# EAGLE board cat layout fnl6 (EAGLE 6.5.0)
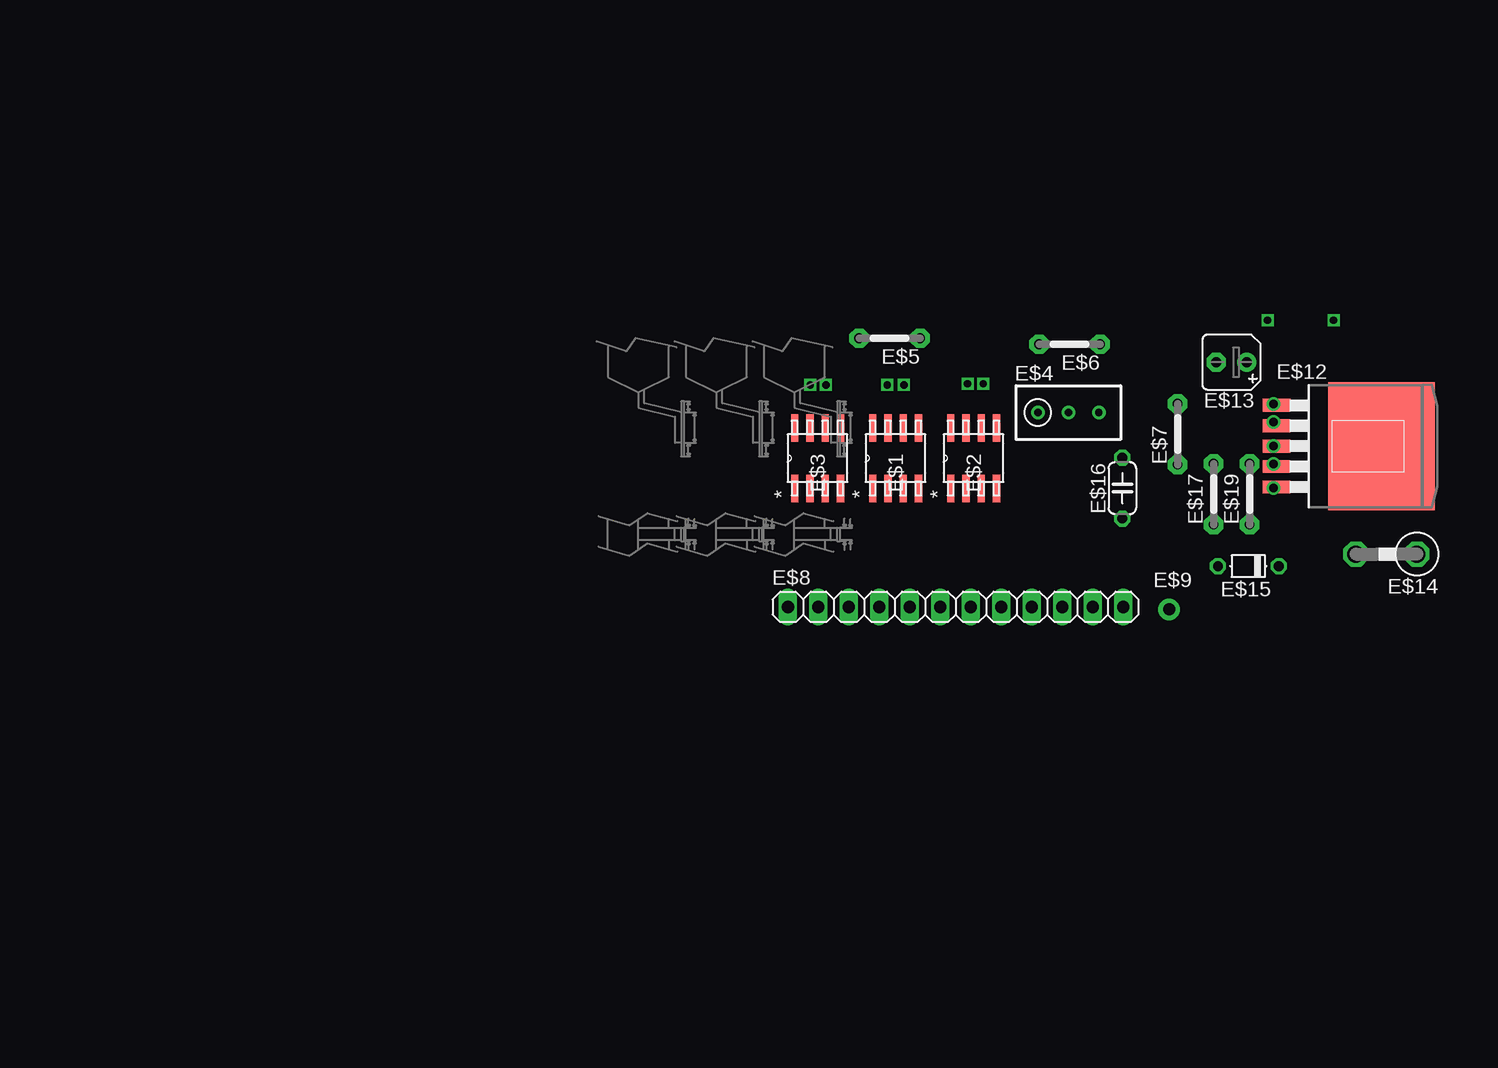
[diagram p0: board, top side]
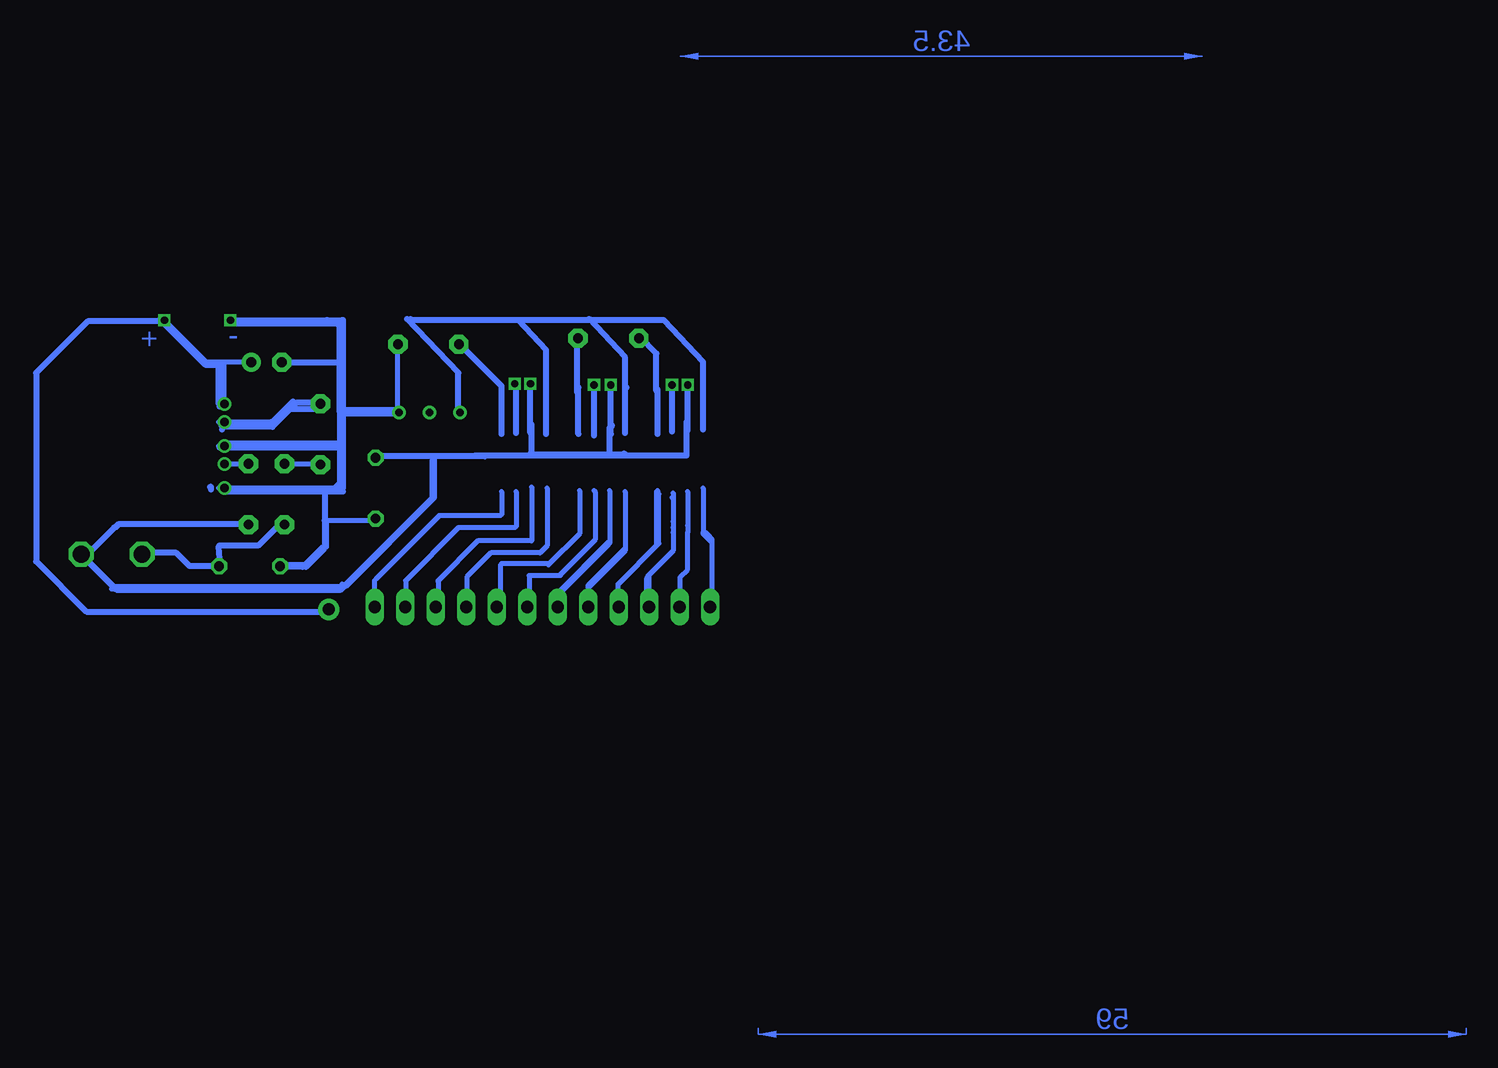
[diagram p1: board, bottom side, seen from below]

No outline drawn. Coordinates in mm, seen from the top.
Copper layers (1*16): Top 0.035mm / dielectric 1.5mm / Bottom 0.035mm
Design rules "default": minimum track width 10mil, minimum drill 24mil, track to track 8mil, track to pad 8mil, pad to pad 8mil, via to via 8mil, smd to smd 8mil, copper to edge 40mil, drill to drill 8mil, minimum pad ring 10mil, minimum via ring 8mil, stop-mask expansion 4mil, vias tented up to drill 0mil, thermal gap 10mil

## Footprints (pad centres in the part's own frame; a part is rotated, then mirrored left to right if it is on the bottom)
M08A-M = smd 2.286 x 0.61: 1 -2.515,1.905; 2 -2.515,0.635; 3 -2.515,-0.635; 4 -2.515,-1.905; 5 2.515,-1.905; 6 2.515,-0.635; 7 2.515,0.635; 8 2.515,1.905
RTRIM3296W = drill 0.61: 1 0,-2.54; 2 0,0; 3 0,2.54
05 = drill 0.813 pad 1.6 octagon: 1 -2.54,0; 2 2.54,0
1X12 = drill 1.016 long: 1 -13.97,0; 2 -11.43,0; 3 -8.89,0; 4 -6.35,0; 5 -3.81,0; 6 -1.27,0; 7 1.27,0; 8 3.81,0; 9 6.35,0; 10 8.89,0; 11 11.43,0; 12 13.97,0
1X01-CLEANBIG = drill 1.016 pad 1.778: 1 0,0
DDPAK5(Q) = smd 1.067 x 2.286: 1 -3.404,-8.763; 2 -1.702,-8.763; 3 0,-8.763; 4 1.702,-8.763; 5 3.404,-8.763 | smd 10.668 x 8.89: TAB 0,0
B45181A = drill 0.813 pad 1.6: + -1.27,0 | drill 0.813 pad 1.6 octagon: - 1.27,0
C1702-05 = drill 1.397 octagon: A 2.54,0; C -2.54,0
D-5 = drill 0.813 octagon: A 2.54,0; C -2.54,0
C050-024X044 = drill 0.813 octagon: 1 -2.54,0; 2 2.54,0

## Placement (x,y rotation side)
E$1  [M08A-M]  39,68.5 90 top
E$2  [M08A-M]  45.5,68.5 90 top
E$3  [M08A-M]  32.5,68.5 90 top
E$4  [RTRIM3296W]  53.4,72.3 270 top
E$5  [05]  38.5,78.5 180 top
E$6  [05]  53.5,78 180 top
E$7  [05]  62.5,70.5 90 top
E$8  [1X12]  44,56.1 0 top
E$9  [1X01-CLEANBIG]  61.8,55.9 0 top
E$12  [DDPAK5(Q)]  79.5,69.5 270 top
E$13  [B45181A]  67,76.5 180 top
E$14  [C1702-05]  79.9,60.5 180 top
E$15  [D-5]  68.4,59.5 180 top
E$16  [C050-024X044]  57.9,66 90 top
E$17  [05]  65.5,65.5 90 top
E$19  [05]  68.5,65.5 90 top

## Library data of the parts
E$1-E$3 = catlm
E$4 E$13-E$15 = ref-packages-longpad
E$5-E$7 E$17 E$19 = Misc
E$8 E$9 = adafruit
E$12 = PowerProducts
E$16 = PAsystem

## Tracks (layer width: path | path; a pad name or v marks a point on that pad's centre or on a via)
S$1
  Bottom 0.5: 51,72.3 51,75.6 55.3,80.1
S$2
  Bottom 0.406: 75.4,63 79.4,63 81.9,60.5 82.4,60.5 79.4,57.5
S$3
  Bottom 0.5: 35.1,56.2 35,56.1
S$4
  Bottom 0.5: 45.2,56.1 45.3,56
S$5
  Bottom 0.406: 53,68.5 53,65.2 60.4,57.8 79.7,57.8 79.9,57.6 79.6,57.6 79.5,57.5 60.8,57.5 60.4,57.9 60.6,57.9 60.7,58 60.4,58 53.2,65.2 53.2,68.3 53.1,68.4
S$6
  Bottom 0.406: 32.5,56.1 32.5,58.6 31.9,59.2 31.9,62.3 31.9,62.9 31.9,65.7
S$7
  Bottom 0.406: 29.9,61.8 29.9,61.5 | 29.9,61.5 29.9,56 | 30.6,66 30.6,62.3 | 29.9,61.5 30.6,62.2 30.6,62.3 | 30,61.9 30.4,62.3 30.6,62.3
S$8
  Bottom 0.5: 75.6,79.9 81.9,79.9 86.2,75.6 86.2,59.9 82,55.7 61.8,55.7 61.4,56.1
S$9
  Bottom 0.406: 37.7,56.1 37.7,58 34.3,61.4 34.3,65.5 34.5,65.7 34.5,61.4
  Bottom 0.5: 37.6,56.2 37.7,56.1
S$11
  Bottom 0.406: 33.1,65.6 33.1,62.7 33.1,62.3 33.1,60.8 35.2,58.7
S$12
  Bottom 0.406: 38.5,61.5 42.7,57.3 42.7,56
S$13
  Bottom 0.406: 43.4,59.7 47.4,59.7 47.5,59.6 47.5,56.1 47.9,55.7
S$14
  Bottom 0.406: 52.7,58.2 52.7,56.5 53,56.2
S$15
  Bottom 0.406: 46.2,65.7 46.2,62.8 46.3,62.7 51,62.7 55.4,58.3 55.4,56.5 55.5,56.4
S$16
  Bottom 0.406: 58,58.3 58,56.2
S$17
  Bottom 0.406: 33.2,65.2 33.1,65.1 33.1,63.2
S$18
  Bottom 0.5: 31.9,70.8 31.9,74.3
S$19  (via drill 0.7)
  Bottom 0.406: 71,69.5 v70.5,69.5
S$20
  Bottom 0.5: 33.2,70.7 33.2,74.4
S$21
  Bottom 0.5: 70.9,59.5 73.4,59.5 74.5,60.6 77.4,60.6 77.5,60.5
S$22
  Bottom 0.5: 70.9,69.4 60.6,69.4 60.6,69.5
S$23
  Bottom 0.5: 34.4,70.5 34.4,74.2
S$24
  Bottom 0.406: 62.5,68 65.5,68
S$25  (via drill 0.7)
  Bottom 0.406: 68.5,68 v70.5,68
S$26  (via drill 0.7)
  Bottom 0.406: v70.5,71.5 71,71.5
S$27
  Bottom 0.5: 37.1,70.6 37.1,74.3 | 37.1,74.3 37,74.4 | 37.1,74.3 37.1,76.9 40.1,80.1
S$28
  Bottom 0.5: 38.3,70.5 38.3,74.3
S$29
  Bottom 0.5: 39.7,70.4 39.7,74.4
S$30
  Bottom 0.5: 41,70.5 41,74.4
S$31
  Bottom 0.5: 43.7,70.5 43.7,77.5 46,80 | 30.6,70.9 30.6,76.5 33.9,80 46,80 | 46,80 54.9,80 55,80.1
S$32
  Bottom 0.5: 45,70.6 45,74.5
S$33
  Bottom 0.5: 46.2,70.6 46.2,74.5
S$34
  Bottom 0.5: 47.4,70.5 47.4,74.1 47.4,74.5 47.5,74.6 51,78.1
S$35
  Bottom 0.406: 58,68.8 58,68.6 | 58,68.6 58,68.5 | 48.8,68.6 58,68.6 | 49.2,68.7 57.9,68.7 58,68.6
  Bottom 0.5: 32,71.5 32,68.7 38.4,68.7 | 38.4,68.7 44.9,68.7 | 44.9,68.7 49.2,68.7 49.6,68.7 | 44.9,68.7 44.9,71.3 | 38.4,68.7 38.4,71 38.2,71.2
S$36
  Bottom 0.5: 37.2,68.9 37.1,68.8 44.9,68.8 45,68.9
S$37
  Bottom 0.406: 34.4,65.8 34.4,63.7
S$38
  Bottom 0.406: 56.1,78 56.1,72.1
S$39
  Bottom 0.5: 34.5,74.1 34.5,77.2 35.9,78.6
S$40
  Bottom 0.5: 41.1,74 41.1,78.3 41,78.4
S$41
  Bottom 0.406: 34.5,65.1 34.4,65 34.4,62.3
S$42  (via drill 0.6, 0.7)
  Bottom 0.406: 76,80 v75.5,80 72,76.5 71,76.5 | 71,73 71,76.5 | 68,76.5 70.5,76.5 | 70.5,76.5 71,76.5 | v70.5,73 70.5,76.5
S$43  (via drill 0.6, 0.7)
  Bottom 0.406: v70.5,66 70.9,66 71,66 | 60.7,80 62,80
  Bottom 0.5: 60.7,72.6 60.7,72.2 56,72.2 56,72.5 60.8,72.5 60.9,72.4 | 60.9,72.4 60.9,72.6 | 60.9,72.6 60.9,79.5 61.1,79.7 70,79.7 70.1,79.8 60.8,79.8 60.8,72.7 60.9,72.6 | 70.9,66 61.3,66 | 61.2,66 60.6,66 60.6,76.5 | 60.6,76.5 60.6,80 60.7,80 60.7,79.9 | 65.8,76.5 60.6,76.5 | 60.9,72.4 60.9,66.4 61.3,66 | 61.3,66 61.2,66 | 61.2,66 60.9,66.3 60.9,66 60.6,65.7 70.4,65.7 70.8,66.1 | v70,80 62,80 61.9,80
S$44
  Bottom 0.5: 71.7,66.1 71.6,66.1 71.6,65.9
S$45
  Bottom 0.406: 57.9,63.2 57.9,63.3 | 57.9,63.3 57.9,63.5 | 57.9,63.3 62,63.3 | 62,63.3 62.1,63.3 | 62,63.3 62,61.1 62.3,61.1 63.8,59.6 | 62.2,63.3 62.2,60.9 63.7,59.4 64,59.4 | 64,59.4 66,59.4 | 64,59.4 63.8,59.6 | 63.8,59.6 65.9,59.6 66.1,59.4
  Bottom 0.5: 62.1,63.3 62.1,65.9 | 66.1,59.4 66.2,59.5
S$46
  Bottom 0.5: 75.6,80.1 75.8,80.1 75.8,80 72.1,76.3 70.7,76.3 70.7,73 70.9,72.8
S$47
  Bottom 0.5: 65.5,63 65.9,63 67.7,61.2 70.9,61.2 71,61.1 70.9,59.6 71,59.5
S$48
  Bottom 0.5: 68.6,63 79.3,63 79.6,62.7 79.7,62.7 82.2,60.2
S$49
  Bottom 0.5: 70.5,71.4 70.7,71.2 70.7,70.9
S$50
  Bottom 0.5: 62.4,73 62.4,72.9
S$51
  Bottom 0.5: 79.6,57.6 82.4,60.4
S$52  (via drill 0.6)
  other vias: 31.9,74.6
S$53  (via drill 0.6)
  other vias: 33.2,74.6
S$54  (via drill 0.6)
  other vias: 38.3,74.6
S$55  (via drill 0.6)
  other vias: 39.7,74.6
S$56  (via drill 0.6)
  other vias: 45,74.7
S$57  (via drill 0.6)
  other vias: 46.3,74.7
S$58
  Bottom 0.5: 62.5,73.1 64.5,73.1 66.5,71.1 70.6,71.1 70.8,71.3
S$59
  Bottom 0.5: 61.1,69.7 70.2,69.7 70.4,69.5
S$60
  Bottom 0.5: 70.4,71.5 66.6,71.5 66.5,71.4 66.5,71.5 64.8,73.2 64.8,72.7 64.9,72.6 62.6,72.6 62.5,72.7
S$61
  Bottom 0.406: 47.4,65.7 47.4,63.8 47.5,63.7 52.6,63.7 57.9,58.4
S$62
  Bottom 0.406: 37.1,65.7 37.1,61 | 37.1,61 40.2,57.9 40.2,57.7 | 40.2,57.7 40.2,55.7 | 37.1,61 37.1,60.8 40.2,57.7
S$63
  Bottom 0.406: 38.4,65.8 38.4,61.4
S$64
  Bottom 0.406: 39.7,65.8 39.6,65.7 39.6,61.7 42.5,58.8 42.5,58.7 45.1,58.7 45.1,56.3 45.4,56
S$65
  Bottom 0.406: 40.9,65.8 40.9,62.2 43.5,59.6
S$66
  Bottom 0.406: 43.6,66 43.6,61.2 44.2,60.6 48.3,60.6 50.3,58.6 50.3,56.3 50.4,56.2
S$67
  Bottom 0.406: 44.9,66.1 44.9,61.6 49.4,61.6 52.7,58.3
S$69
  Bottom 0.406: 35.3,55.9 35.3,58.5 35.2,58.6
S$70
  Bottom 0.406: 38.5,61.4 38.5,61.3 42.9,56.9
S$71
  Bottom 0.406: 35.1,56 35.1,58.6
(copper drawn outside any net)
  shapes: Bottom area x2

## Text on the board
Bottom: - | +